# Altium PCB PCB_PCI_mez.PcbDoc
Units mm, origin at the board's own origin, x right, y up, seen from the top; angles counter-clockwise.
Board outline 106 x 57 mm, 2 copper layers (Top Layer, Bottom Layer); 6 components, 71 nets, 248 pads, 0 vias.
Unrouted connection lines stored in the file: 8.
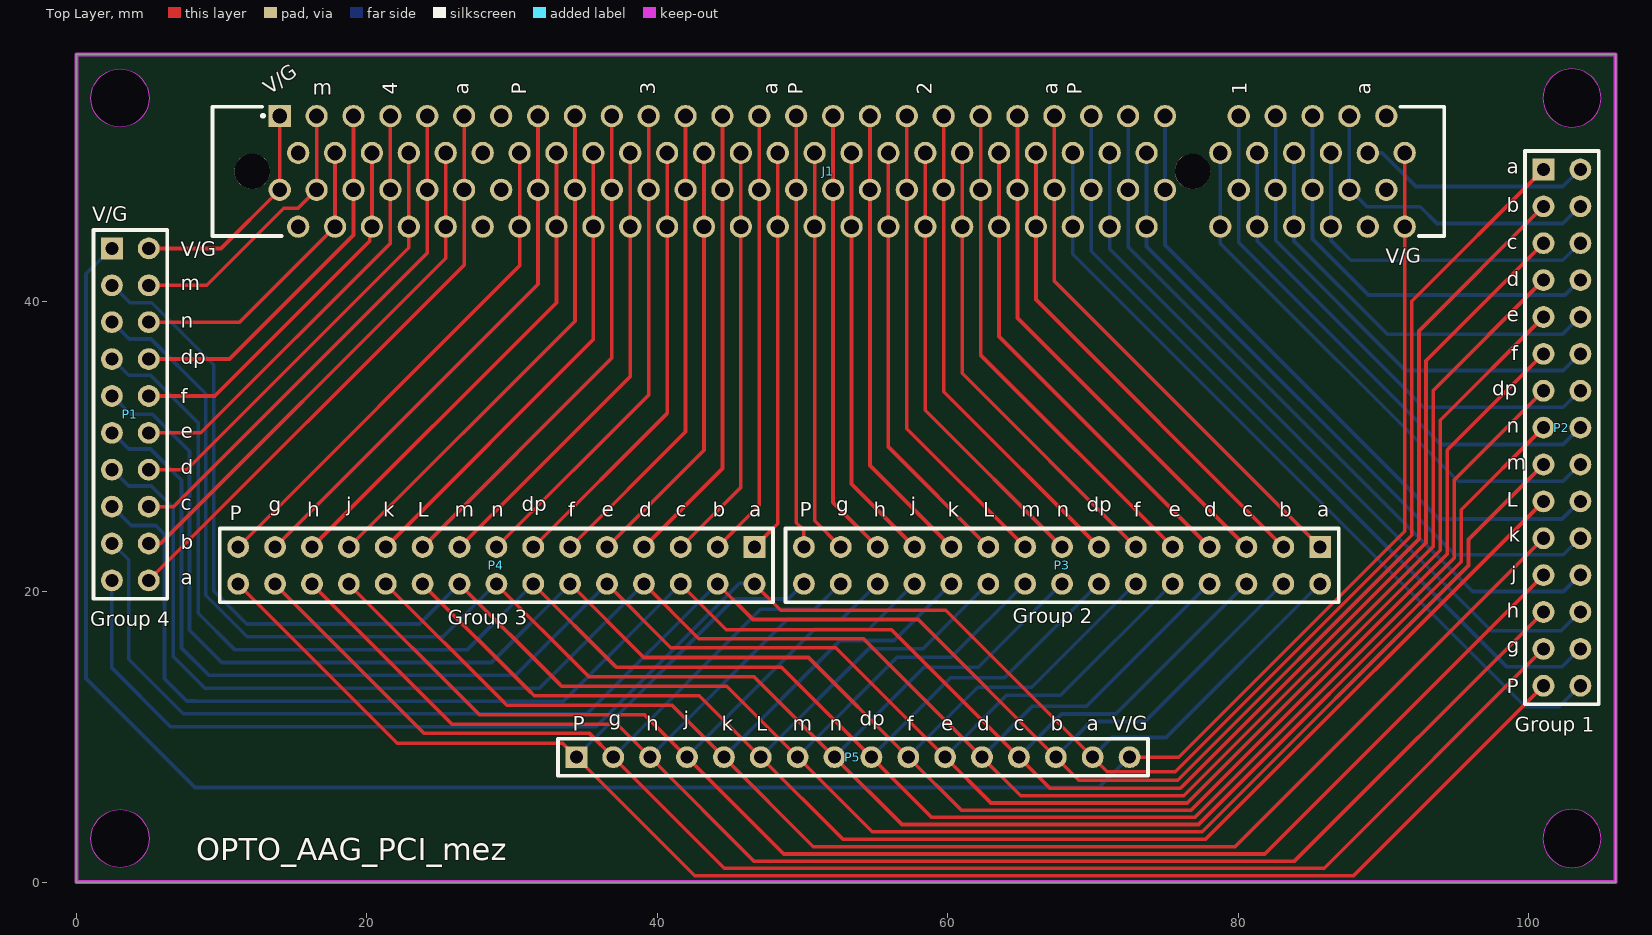
[diagram p0: Top Layer view]
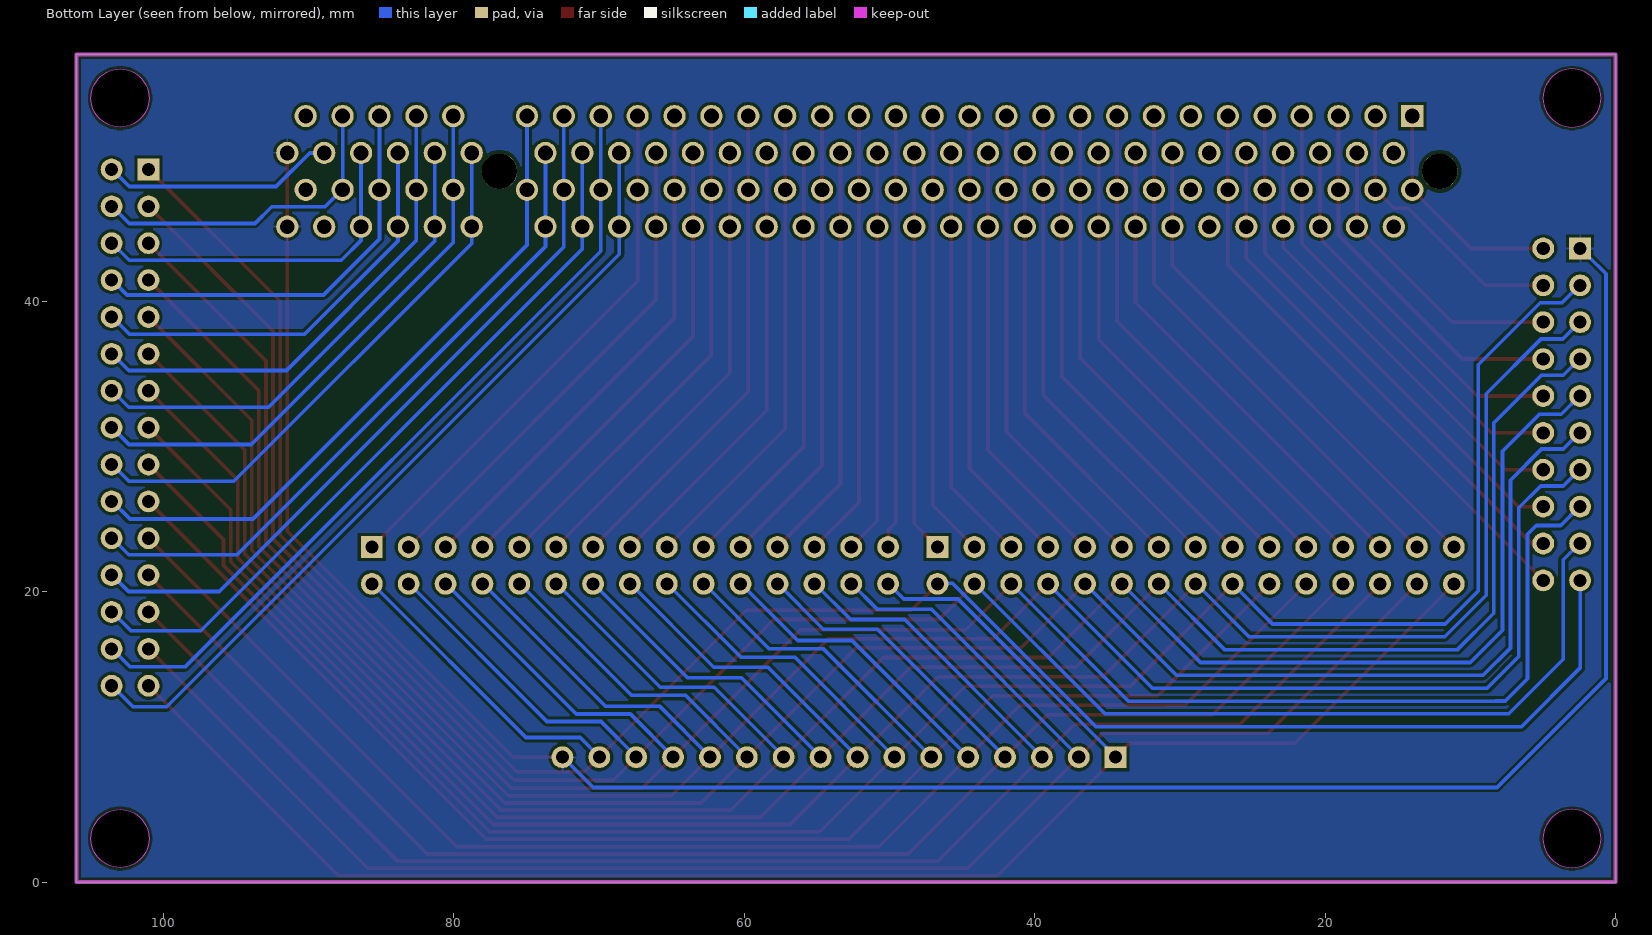
[diagram p1: Bottom Layer view, seen from below]

## Layer stack, top to bottom
Top Solder: solder mask 0.0102, Solder Resist, Dk 3.5
Top Layer: signal copper 0.0356
Dielectric 1: dielectric 0.32, FR-4, Dk 4.8
Bottom Layer: signal copper 0.0356
Bottom Solder: solder mask 0.0102, Solder Resist, Dk 3.5

## Board outline
0,0 0,57 106,57 106,0
cut-out: 101,3 ccw(c103,3) 103,1 ccw(c103,3) 105,3 ccw(c103,3) 103,5 ccw(c103,3)
cut-out: 101,54 ccw(c103,54) 103,52 ccw(c103,54) 105,54 ccw(c103,54) 103,56 ccw(c103,54)
cut-out: 3,52 cw(c3,54) 1,54 cw(c3,54) 3,56 cw(c3,54) 5,54 cw(c3,54)
cut-out: 3,1 cw(c3,3) 1,3 cw(c3,3) 3,5 cw(c3,3) 5,3 cw(c3,3)

## Design rules (kind name [scope] priority, off if disabled: settings)
BoardOutlineClearance [OnLayer('Multi-Layer')] p1: gap=0.254 ignorepadtopadclearanceinfootprint=FALSE except(0: Arc-SplitContinuation Track-SplitContinuation SMDPad-SplitContinuation THPad-SplitContinuation Via-SplitContinuation Fill-SplitContinuation Poly-SplitContinuation Region-SplitContinuation Text-SplitContinuation; 0.4: Arc-OutlineEdge Track-OutlineEdge SMDPad-OutlineEdge THPad-OutlineEdge Via-OutlineEdge Fill-OutlineEdge Poly-OutlineEdge Region-OutlineEdge Text-OutlineEdge)
Clearance [All] p1: gap=0.125 ignorepadtopadclearanceinfootprint=FALSE except(0.2: Arc-Fill Arc-Poly Track-Fill Track-Poly SMDPad-Fill SMDPad-Poly THPad-Fill THPad-Poly Via-Fill Via-Poly Fill-Fill Fill-Poly Poly-Poly Poly-Region Poly-Text; 0.25: Arc-Hole Track-Hole SMDPad-Hole THPad-Hole Via-Hole Fill-Hole Poly-Hole Region-Hole Text-Hole) // Standart
DiffPairsRouting [All] p1: maxlimit=0.254 minlimit=0.127 mostfreqgap=0.13 toplayer_minwidth=0.127 toplayer_maxwidth=0.381 toplayer_prefwidth=0.37 bottomlayer_minwidth=0.127 bottomlayer_maxwidth=0.381 bottomlayer_prefwidth=0.37 maxuncoupledlength=12.7
HoleSize [All] p1: absolutevalues=TRUE maxlimit=5 minlimit=0.3 maxpercent=80.000 minpercent=20.000
MinimumSolderMaskSliver [All] p1: minsoldermaskwidth=0.1
PlaneClearance "PlaneClearance-1 1/2 Oz" [All] p1: clearance=0.2 // Standart
PlaneConnect "TermalConnect-1 1/2 Oz" [All] p1: planeconnectstyle=Relief reliefexpansion=0.2 reliefentries=4 reliefconductorwidth=0.2 reliefairgap=0.2 // Standart
PolygonConnect "PolygonConnect-1 1/2 Oz" [All] p1: thpad.connectstyle=Relief thpad.reliefconductorwidth=0.15 thpad.reliefentries=4 thpad.polygonreliefangle="90 Angle" thpad.airgapwidth=0.2 smdpad.connectstyle=Relief smdpad.reliefconductorwidth=0.2 smdpad.reliefentries=4 smdpad.polygonreliefangle="90 Angle" smdpad.airgapwidth=0.2 via.connectstyle=Direct via.reliefconductorwidth=0.254 via.reliefentries=4 via.polygonreliefangle="90 Angle" via.airgapwidth=0.254 // Standart
RoutingVias [All] p1: holewidth=0.3 width=1.27 viastyle="Through Hole" minholewidth=0.3 minwidth=0.6 maxholewidth=0.711 maxwidth=1.27
SilkToSilkClearance [All] p1: silktosilkclearance=0
SilkToSolderMaskClearance [IsPad] p1: minsilkscreentomaskgap=0 clearancetoexposedcopper=TRUE
SolderMaskExpansion [All] p1: expansion=0.102 istentingtop=FALSE
SupplyNets [All] p1: voltage=0,000
UnRoutedNet [All] p1: checkbadconnections=TRUE
Width [All] p1: maxlimit=2.5 minlimit=0.125 preferedwidth=0.37
22 further rules are at their usual default settings.

## Classes and differential pairs
component class Sheet1_PCI_mez: J1 P2 P3 P4 P5

## Components (designator, comment, footprint, x,y, rotation, side; value= is the part's Value field where it differs from the comment)
J1 "5145154-4" TE_5145154-4 51.79,48.95 r180 top
P1 "Header 10X2" HDR2X10 2.44,43.64 r270 top
P2 "Header 15X2" HDR2X15 101.04,49.08 r270 top
P3 "Header 15X2" HDR2X15 85.66,23.08 r180 top
P4 "Header 15X2" HDR2X15 46.7,23.08 r180 top
P5 "Header 16" HDR1X16 34.43,8.6 r0 top

## Footprints (in the part's own frame and the unit in brackets; to place one, negate y for a bottom-side part, rotate by r counter-clockwise, add the part's x,y. Pads: shape width x height; smd on the part's side, far side on the other; paste and mask are expansions set on the pad)
HDR1X16 [mm] "Connector; Header; 16 Position"
  rect 1.5x1.5 hole 0.9: 1(0,0)
  round 1.5 hole 0.9: 2(2.54,0) 3(5.08,0) 4(7.62,0) 5(10.16,0) 6(12.7,0) 7(15.24,0) 8(17.78,0) 9(20.32,0) 10(22.86,0) 11(25.4,0) 12(27.94,0) 13(30.48,0) 14(33.02,0) 15(35.56,0) 16(38.1,0)
  silkscreen extent -1.27,-1.27 39.37,1.27
HDR2X10 [mm] "Connector; Header; 10x2 Position"
  rect 1.5x1.5 hole 0.9: 1(0,0)
  round 1.5 hole 0.9: 2(0,2.54) 3(2.54,0) 4(2.54,2.54) 5(5.08,0) 6(5.08,2.54) 7(7.62,0) 8(7.62,2.54) 9(10.16,0) 10(10.16,2.54) 11(12.7,0) 12(12.7,2.54) 13(15.24,0) 14(15.24,2.54) 15(17.78,0) 16(17.78,2.54) 17(20.32,0) 18(20.32,2.54) 19(22.86,0) 20(22.86,2.54)
  silkscreen extent -1.27,-1.27 24.13,3.81
HDR2X15 [mm] "Connector; Header; 15x2 Position"
  rect 1.5x1.5 hole 0.9: 1(0,0)
  round 1.5 hole 0.9: 2(0,2.54) 3(2.54,0) 4(2.54,2.54) 5(5.08,0) 6(5.08,2.54) 7(7.62,0) 8(7.62,2.54) 9(10.16,0) 10(10.16,2.54) 11(12.7,0) 12(12.7,2.54) 13(15.24,0) 14(15.24,2.54) 15(17.78,0) 16(17.78,2.54) 17(20.32,0) 18(20.32,2.54) 19(22.86,0) 20(22.86,2.54) 21(25.4,0) 22(25.4,2.54) 23(27.94,0) 24(27.94,2.54) 25(30.48,0) 26(30.48,2.54) 27(33.02,0) 28(33.02,2.54) 29(35.56,0) 30(35.56,2.54)
  silkscreen extent -1.27,-1.27 36.83,3.81
TE_5145154-4 [mm]
  rect 1.53x1.53 / inner round 1.53 / far side rect 1.53x1.53 hole 1.02: 1(37.79,-3.81)
  round 1.53 hole 1.02: 2(36.52,-1.27) 3(35.25,-3.81) 4(33.98,-1.27) 5(32.71,-3.81) 6(31.44,-1.27) 7(30.17,-3.81) 8(28.9,-1.27) 9(27.63,-3.81) 10(26.36,-1.27) 11(25.09,-3.81) 12(23.81,-1.27) 13(22.54,-3.81) 14(21.27,-1.27) 15(20,-3.81) 16(18.73,-1.27) 17(17.46,-3.81) 18(16.19,-1.27) 19(14.92,-3.81) 20(13.65,-1.27) 21(12.38,-3.81) 22(11.11,-1.27) 23(9.84,-3.81) 24(8.57,-1.27) 25(7.3,-3.81) 26(6.03,-1.27) 27(4.76,-3.81) 28(3.49,-1.27) 29(2.22,-3.81) 30(0.95,-1.27) 31(-0.32,-3.81) 32(-1.59,-1.27) 33(-2.86,-3.81) 34(-4.13,-1.27) 35(-5.4,-3.81) 36(-6.67,-1.27) 37(-7.94,-3.81) 38(-9.21,-1.27) 39(-10.48,-3.81) 40(-11.75,-1.27) 41(-13.02,-3.81) 42(-14.29,-1.27) 43(-15.56,-3.81) 44(-16.83,-1.27) 45(-18.1,-3.81) 46(-19.37,-1.27) 47(-20.64,-3.81) 48(-21.91,-1.27) 49(-23.18,-3.81) 50(-26.99,-1.27) 51(-28.26,-3.81) 52(-29.53,-1.27) 53(-30.8,-3.81) 54(-32.07,-1.27) 55(-33.34,-3.81) 56(-34.61,-1.27) 57(-35.88,-3.81) 58(-37.15,-1.27) 59(-38.42,-3.81) 60(-39.69,-1.27) 61(37.79,1.27) 62(36.52,3.81) 63(35.25,1.27) 64(33.98,3.81) 65(32.71,1.27) 66(31.44,3.81) 67(30.17,1.27) 68(28.9,3.81) 69(27.63,1.27) 70(26.36,3.81) 71(25.09,1.27) 72(23.81,3.81) 73(22.54,1.27) 74(21.27,3.81) 75(20,1.27) 76(18.73,3.81) 77(17.46,1.27) 78(16.19,3.81) 79(14.92,1.27) 80(13.65,3.81) 81(12.38,1.27) 82(11.11,3.81) 83(9.84,1.27) 84(8.57,3.81) 85(7.3,1.27) 86(6.03,3.81) 87(4.76,1.27) 88(3.49,3.81) 89(2.22,1.27) 90(0.95,3.81) 91(-0.32,1.27) 92(-1.59,3.81) 93(-2.86,1.27) 94(-4.13,3.81) 95(-5.4,1.27) 96(-6.67,3.81) 97(-7.94,1.27) 98(-9.21,3.81) 99(-10.48,1.27) 100(-11.75,3.81) 101(-13.02,1.27) 102(-14.29,3.81) 103(-15.56,1.27) 104(-16.83,3.81) 105(-18.1,1.27) 106(-19.37,3.81) 107(-20.64,1.27) 108(-21.91,3.81) 109(-23.18,1.27) 110(-26.99,3.81) 111(-28.26,1.27) 112(-29.53,3.81) 113(-30.8,1.27) 114(-32.07,3.81) 115(-33.34,1.27) 116(-34.61,3.81) 117(-35.88,1.27) 118(-37.15,3.81) 119(-38.42,1.27) 120(-39.69,3.81)
  round 2.44 hole 2.44 unplated: ""(-25.08,0) ""(39.69,0)
  silkscreen extent -42.42,-4.45 42.42,4.45, body extent -43.38,-4.45 41.45,4.45, height 17.53

## Part data
J1: "Conn, Card Edge, Thermoplastic, White, 60 Dual Pos., Gold Cont., PCI", Package=None, Centerline_Pitch="1.27 mm[.05 in]", Check_prices=https://www.snapeda.com/parts/5145154-4/TE+Connectivity+AMP+Connectors/view-part/?ref=eda, EU_RoHS_Compliance=Compliant, MF="TE Connectivity", MP=5145154-4, Number_of_Positions=120, Product_Type=Connector, SnapEDA_Link=https://www.snapeda.com/parts/5145154-4/TE+Connectivity+AMP+Connectors/view-part/?ref=snap
P1: "Header, 10-Pin, Dual row", LatestRevisionDate=17-Jul-2002, LatestRevisionNote="Re-released for DXP Platform.", Publisher="Altium Limited"
P2 P3 P4: "Header, 15-Pin, Dual row", LatestRevisionDate=17-Jul-2002, LatestRevisionNote="Re-released for DXP Platform.", Publisher="Altium Limited"
P5: "Header, 16-Pin", LatestRevisionDate=17-Jul-2002, LatestRevisionNote="Re-released for DXP Platform.", Publisher="Altium Limited"

## Nets (pads, with @x,y where several pads share a name; then routed paths per layer and width w, separated by ;. In a path a pad name is that pad's centre, name@x,y a point inside that pad or via, vN(x,y) a via of type N, cw(c..) or ccw(c..) an arc to the next point about the centre after c; other vN are vias at no path point)
a: P1.19 P2.1 P3.2 P4.2 P5.15 | length 163
  Top Layer w0.254: P4.2@46.7,20.52 48.5,18.72 59.87,18.72 P5.15 70.992,7.598 75.678,7.598 91.969,23.889 91.969,40.009 P2.1
  Bottom Layer w0.254: P1.19@2.44,20.82 P1.19 2.44,14.74 6.48,10.7 35.779,10.7 45.659,20.58 P4.2@46.7,20.58 ; P5.15@69.99,8.64 71.31,9.96 75.04,9.96 P3.2@85.66,20.58
a1: J1.58 P2.2 | length 16.1
  Bottom Layer w0.254: J1.58@88.963,50.22 88.965,50.218 89.937,50.218 92.256,47.9 102.36,47.9 P2.2@103.58,49.12
a2: J1.43 J1.103 P3.1 | length 37.3
  Top Layer w0.254: J1.43 J1.103 67.35,41.39 P3.1
a3: J1.28 J1.88 P4.1 | length 27.8
  Top Layer w0.254: P4.1 47.323,23.703 48.3,24.68 J1.88 J1.28
a4: J1.11 J1.71 P1.20 | length 41
  Top Layer w0.254: P1.20 26.7,42.5 J1.71 J1.11
b: P1.17 P2.3 P3.4 P4.4 P5.14 | length 162.2
  Top Layer w0.254: P4.4@44.16,20.52 46.6,18.08 57.97,18.08 P5.14 69.03,7.02 75.843,7.02 92.46,23.637 92.46,37.96 P2.3
  Bottom Layer w0.254: P1.17@2.44,23.36 3.599,22.201 3.599,15.346 7.36,11.585 35.165,11.585 P4.4@44.16,20.58 ; P5.14@67.45,8.64 69.87,11.06 73.6,11.06 P3.4@83.12,20.58
b1: J1.57 J1.117 P2.4 | length 22.5
  Bottom Layer w0.254: J1.57@87.67,52.8 87.67,47.72 88.881,46.509 92.551,46.509 93.7,45.36 102.36,45.36 P2.4@103.58,46.58
b2: J1.42 J1.102 P3.3 | length 34.2
  Top Layer w0.254: J1.42 J1.102 66.08,40.12 P3.3
b3: J1.27 J1.87 P4.3 | length 30.9
  Top Layer w0.254: P4.3 47.03,25.95 J1.87 J1.27
b4: J1.10 J1.70 P1.18 | length 35.8
  Top Layer w0.254: P1.18 5.78,23.32 25.43,42.97 J1.70 J1.10
c: P1.15 P2.5 P3.6 P4.6 P5.13 | length 162.7
  Top Layer w0.254: P4.6@41.62,20.52 44.759,17.381 56.129,17.381 P5.13 67.05,6.46 76.03,6.46 92.94,23.37 92.94,35.9 P2.5
  Bottom Layer w0.254: P1.15@2.44,25.9 3.78,24.56 5.46,24.56 6.063,23.957 6.063,13.997 7.59,12.47 8.24,12.47 30.96,12.46 33.54,12.46 P4.6 ; P4.6@41.6,20.56 P4.6@41.62,20.58 ; P5.13@64.91,8.64 67.85,11.58 71.58,11.58 P3.6@80.58,20.58
c1: J1.56 J1.116 P2.6 | length 24.3
  Bottom Layer w0.254: J1.56@86.4,50.26 J1.56 J1.116 86.4,44.18 87.76,42.82 102.36,42.82 P2.6@103.58,44.04
c2: J1.41 J1.101 P3.5 | length 36.2
  Top Layer w0.254: J1.41 J1.101 64.81,38.85 P3.5
c3: J1.26 J1.86 P4.5 | length 28.9
  Top Layer w0.254: P4.5@41.62,23.06 45.76,27.2 J1.86 J1.26
c4: J1.9 J1.69 P1.16 | length 35.9
  Top Layer w0.254: P1.16 6.7,25.86 24.16,43.32 J1.69 J1.9
d: P1.13 P2.7 P3.8 P4.8 P5.12 | length 161.5
  Top Layer w0.254: P4.8 42.86,16.76 54.21,16.76 P5.12 65.03,5.94 76.268,5.94 93.44,23.112 93.44,33.86 P2.7
  Bottom Layer w0.254: P1.13@2.44,28.44 3.599,27.281 5.159,27.281 6.66,25.78 6.66,15.54 8.845,13.355 31.895,13.355 P4.8 ; P5.12@62.37,8.64 65.85,12.12 69.58,12.12 P3.8@78.04,20.58
d1: J1.55 J1.115 P2.8 | length 29
  Bottom Layer w0.254: J1.55@85.13,52.8 J1.115 85.13,44.29 88.98,40.44 102.52,40.44 P2.8@103.58,41.5
d2: J1.40 J1.100 P3.7 | length 33.1
  Top Layer w0.254: J1.40 J1.100 63.54,37.58 P3.7
d3: J1.25 J1.85 P4.7 | length 31.9
  Top Layer w0.254: P4.7 44.49,28.49 J1.85 J1.25
d4: J1.8 J1.68 P1.14 | length 30.8
  Top Layer w0.254: P1.14 7.6,28.4 22.89,43.69 J1.68 J1.8
dp: P1.7 P2.13 P3.14 P4.14 P5.9 | length 159.1
  Top Layer w0.254: P4.14@31.46,20.52 37.055,14.925 37.186,14.794 48.556,14.794 P5.9 58.89,4.46 77.044,4.46 94.9,22.316 94.9,27.7 P2.13
  Bottom Layer w0.254: P1.7@2.44,36.06 3.599,34.901 5.098,34.901 8.38,31.619 8.38,18.51 10.88,16.01 26.93,16.01 P4.14 ; P4.14@31.44,20.56 P4.14@31.46,20.58 ; P5.9@54.75,8.64 60.19,14.08 63.92,14.08 P3.14@70.42,20.58
dp1: J1.52 J1.112 P2.14 | length 33.6
  Bottom Layer w0.254: J1.52@81.32,50.26 J1.52 J1.112 81.32,44.158 92.778,32.7 102.4,32.7 P2.14@103.58,33.88
dp2: J1.37 J1.97 P3.13 | length 34.1
  Top Layer w0.254: J1.37 J1.97 59.73,33.77 P3.13
dp3: J1.22 J1.82 P4.13 | length 31
  Top Layer w0.254: P4.13@31.46,23.06 40.68,32.28 J1.82 J1.22
dp4: J1.5 J1.65 P1.8 | length 25.8
  Top Layer w0.254: P1.8 10.54,36.02 19.08,44.56 J1.65 J1.5
e: P1.11 P2.9 P3.10 P4.10 P5.11 | length 160.9
  Top Layer w0.254: P4.10 40.937,16.143 52.287,16.143 P5.11 62.99,5.44 76.51,5.44 93.923,22.853 93.923,31.803 P2.9
  Bottom Layer w0.254: P1.11@2.44,30.98 3.599,29.821 5.098,29.821 7.24,27.679 7.24,16.12 9.12,14.24 30.24,14.24 P4.10 ; P4.10@36.52,20.56 P4.10@36.54,20.58 ; P5.11@59.83,8.64 64.05,12.86 67.78,12.86 P3.10@75.5,20.58
e1: J1.54 J1.114 P2.10 | length 29
  Bottom Layer w0.254: J1.54@83.86,50.26 J1.54 J1.114 83.86,44.153 90.273,37.74 102.36,37.74 P2.10@103.58,38.96
e2: J1.39 J1.99 P3.9 | length 35.2
  Top Layer w0.254: J1.39 J1.99 62.27,36.31 P3.9
e3: J1.24 J1.84 P4.9 | length 29.9
  Top Layer w0.254: P4.9@36.54,23.06 43.22,29.74 J1.84 J1.24
e4: J1.7 J1.67 P1.12 | length 30.8
  Top Layer w0.254: P1.12 8.56,30.94 21.62,44 J1.67 J1.7
f: P1.9 P2.11 P3.12 P4.12 P5.10 | length 160
  Top Layer w0.254: P4.12 39.071,15.469 50.421,15.469 P5.10 60.95,4.94 76.76,4.94 94.411,22.592 94.411,29.751 P2.11
  Bottom Layer w0.254: P1.9@2.44,33.52 3.74,32.22 5.239,32.22 7.78,29.679 7.78,17.345 10,15.125 28.585,15.125 P4.12 ; P4.12@33.98,20.56 P4.12@34,20.58 ; P5.10@57.29,8.64 62.07,13.42 65.8,13.42 P3.12@72.96,20.58
f1: J1.53 J1.113 P2.12 | length 33.8
  Bottom Layer w0.254: J1.113 82.59,44.19 91.54,35.24 102.4,35.24 P2.12@103.58,36.42 ; J1.113@82.59,47.72 J1.53@82.59,52.8
f2: J1.38 J1.98 P3.11 | length 32.1
  Top Layer w0.254: J1.38 J1.98 61,35.04 P3.11
f3: J1.23 J1.83 P4.11 | length 33
  Top Layer w0.254: P4.11@34,23.06 41.95,31.01 J1.83 J1.23
f4: J1.6 J1.66 P1.10 | length 25.8
  Top Layer w0.254: P1.10 9.52,33.48 20.209,44.169 20.209,44.999 J1.66 J1.6
g: P2.27 P3.28 P4.28 P5.2 | length 122.3
  Top Layer w0.254: P4.28@13.68,20.52 23.96,10.24 35.33,10.24 P5.2 44.61,0.96 85.94,0.96 ; 85.924,0.944 85.94,0.96 ; P2.27@101.024,16.044 85.94,0.96
  Bottom Layer w0.254: P5.2@36.97,8.64 47.13,18.8 50.86,18.8 P3.28@52.64,20.58
g1: J1.45 J1.105 P2.28 | length 55.4
  Bottom Layer w0.254: J1.45@69.89,52.8 J1.45 J1.105 69.89,43.454 98.524,14.82 102.3,14.82 P2.28@103.58,16.1
g2: J1.30 J1.90 P3.27 | length 27.9
  Top Layer w0.254: J1.30 50.84,24.88 P3.27
g3: J1.15 J1.75 P4.27 | length 37.2
  Top Layer w0.254: P4.27@13.69,23.07 31.79,41.17 J1.75 J1.15
h: P2.25 P3.26 P4.26 P5.3 | length 120.4
  Top Layer w0.254: P4.26@16.22,20.52 25.66,11.08 25.871,10.869 37.241,10.869 P5.3 46.67,1.44 83.88,1.44 ; 83.888,1.448 P2.25@101.048,18.608
  Bottom Layer w0.254: P5.3@39.51,8.64 48.95,18.08 52.68,18.08 P3.26@55.18,20.58
h1: J1.46 J1.106 P2.26 | length 50.5
  Bottom Layer w0.254: J1.46@71.16,50.26 J1.106 71.16,43.6 97.448,17.312 102.252,17.312 P2.26@103.58,18.64
h2: J1.31 J1.91 P3.25 | length 31
  Top Layer w0.254: J1.31 J1.91 52.11,26.15 P3.25
h3: J1.16 J1.76 P4.25 | length 34.1
  Top Layer w0.254: P4.25@16.23,23.07 33.06,39.9 J1.76 J1.16
j: P2.23 P3.24 P4.24 P5.4 | length 118.5
  Top Layer w0.254: P4.24@18.76,20.52 27.38,11.9 27.757,11.523 39.127,11.523 P5.4 48.71,1.94 81.84,1.94 ; 81.852,1.952 P2.23@101.052,21.152
  Bottom Layer w0.254: P5.4@42.05,8.64 50.83,17.42 54.56,17.42 P3.24@57.72,20.58
j1: J1.47 J1.107 P2.24 | length 50.5
  Bottom Layer w0.254: J1.107 72.43,43.75 96.172,20.008 102.408,20.008 P2.24@103.58,21.18 ; J1.107@72.43,47.72 J1.47@72.43,52.8
j2: J1.32 J1.92 P3.23 | length 28.9
  Top Layer w0.254: J1.32 J1.92 53.38,27.42 P3.23
j3: J1.17 J1.77 P4.23 | length 36.1
  Top Layer w0.254: P4.23@18.76,23.06 34.33,38.63 J1.77 J1.17
k: P2.21 P3.22 P4.22 P5.5 | length 116.6
  Top Layer w0.254: P4.22@21.3,20.52 29.265,12.555 29.643,12.177 41.013,12.177 P5.5 50.75,2.44 79.8,2.44 ; 79.816,2.456 P2.21@101.056,23.696
  Bottom Layer w0.254: P5.5@44.59,8.64 52.59,16.64 56.32,16.64 P3.22@60.26,20.58
k1: J1.48 J1.108 P2.22 | length 45.6
  Bottom Layer w0.254: J1.108 73.7,43.78 94.936,22.544 102.404,22.544 P2.22@103.58,23.72 ; J1.108@73.7,45.18 J1.48@73.7,50.26
k2: J1.33 J1.93 P3.21 | length 32
  Top Layer w0.254: J1.33 J1.93 54.65,28.69 P3.21
k3: J1.18 J1.78 P4.21 | length 33.1
  Top Layer w0.254: P4.21@21.31,23.07 35.6,37.36 J1.78 J1.18
L: P2.19 P3.20 P4.20 P5.6 | length 114.7
  Top Layer w0.254: P4.20@23.84,20.52 31.16,13.2 31.529,12.831 42.899,12.831 P5.6 52.77,2.96 77.78,2.96 P2.19
  Bottom Layer w0.254: P5.6@47.13,8.64 54.55,16.06 58.28,16.06 P3.20@62.8,20.58
L1: J1.49 J1.109 P2.20 | length 45.9
  Bottom Layer w0.254: J1.49@74.97,52.8 74.97,47.72 74.97,43.87 93.84,25 102.32,25 P2.20@103.58,26.26
L2: J1.34 J1.94 P3.19 | length 30
  Top Layer w0.254: J1.34 J1.94 55.92,29.96 P3.19
L3: J1.19 J1.79 P4.19 | length 35.1
  Top Layer w0.254: P4.19@23.859,23.079 36.87,36.09 J1.79 J1.19
m: P1.3 P2.17 P3.18 P4.18 P5.7 | length 157.8
  Top Layer w0.254: P4.18@26.38,20.52 33.16,13.74 33.414,13.486 44.784,13.486 P5.7 54.806,3.464 77.534,3.464 95.877,21.807 95.877,23.597 P2.17
  Bottom Layer w0.254: P1.3@2.44,41.14 3.68,39.9 5.179,39.9 9.449,35.63 9.449,20.051 11.72,17.78 23.62,17.78 P4.18 ; P4.18@26.36,20.56 P4.18@26.38,20.58 ; P5.7@49.67,8.64 56.51,15.48 60.24,15.48 P3.18@65.34,20.58
m1: J1.50 J1.110 P2.18 | length 38.3
  Bottom Layer w0.254: J1.110 78.78,43.98 95.16,27.6 102.38,27.6 P2.18@103.58,28.8 ; J1.110@78.78,45.18 J1.50@78.78,50.26
m2: J1.35 J1.95 P3.17 | length 33.1
  Top Layer w0.254: J1.35 J1.95 57.19,31.23 P3.17
m3: J1.20 J1.80 P4.17 | length 32
  Top Layer w0.254: P4.17@26.381,23.061 38.14,34.82 J1.80 J1.20
m4: J1.3 J1.63 P1.4 | length 19.4
  Top Layer w0.254: P1.4 8.98,41.1 14.28,46.4 15.26,46.4 J1.63 J1.3
n: P1.5 P2.15 P3.16 P4.16 P5.8 | length 158.1
  Top Layer w0.254: P4.16@28.92,20.52 35.01,14.43 35.3,14.14 46.67,14.14 P5.8 56.85,3.96 77.274,3.96 95.38,22.066 95.38,25.64 P2.15
  Bottom Layer w0.254: P1.5@2.44,38.6 3.64,37.4 5.139,37.4 8.9,33.639 8.9,19.76 11.76,16.9 11.76,16.895 25.24,16.895 ; 25.24,16.9 P4.16@28.92,20.58 ; P5.8@52.21,8.64 58.37,14.8 62.1,14.8 P3.16@67.88,20.58
n1: J1.51 J1.111 P2.16 | length 38.5
  Bottom Layer w0.254: J1.111 80.05,44.05 93.96,30.14 102.38,30.14 P2.16@103.58,31.34 ; J1.111@80.05,47.72 J1.51@80.05,52.8
n2: J1.36 J1.96 P3.15 | length 31
  Top Layer w0.254: J1.36 J1.96 58.46,32.5 P3.15
n3: J1.21 J1.81 P4.15 | length 34
  Top Layer w0.254: P4.15@28.92,23.06 39.41,33.55 J1.81 J1.21
n4: J1.4 J1.64 P1.6 | length 20.6
  Top Layer w0.254: P1.6 11.23,38.56 J1.64 J1.4
P: P2.29 P3.30 P4.30 P5.1 | length 124.3
  Top Layer w0.254: P4.30@11.14,20.52 22.1,9.56 33.47,9.56 P5.1 42.59,0.44 87.96,0.44 P2.29
  Bottom Layer w0.254: P5.1@34.43,8.64 45.29,19.5 49.02,19.5 P3.30@50.1,20.58
P1: J1.44 J1.104 P2.30 | length 55.5
  Bottom Layer w0.254: J1.44@68.62,50.26 68.62,45.18 68.62,43.24 99.78,12.08 102.1,12.08 P2.30@103.58,13.56
P2: J1.29 J1.89 P3.29 | length 29.9
  Top Layer w0.254: J1.29 J1.89 49.57,24.75 50.1,24.22 P3.29
P3: J1.14 J1.74 P4.29 | length 35.2
  Top Layer w0.254: P4.29@11.14,23.06 30.52,42.44 J1.74 J1.14
V/G: J1.60 J1.120 P1.1 P5.16 | length 157.7
  Top Layer w0.254: P5.16 75.92,8.6 91.48,24.16 J1.120 J1.60
  Bottom Layer w0.254: P1.1@2.44,43.68 1.875,43.115 1.875,43.11 0.66,41.895 0.66,14.02 8.16,6.52 70.41,6.52 P5.16@72.53,8.64
"V/G 2": J1.1 J1.61 P1.2 | length 15.8
  Top Layer w0.254: P1.2 9.96,43.64 J1.61 J1.1
pads on no net: J1. J1.2 J1.12 J1.13 J1.59 J1.62 J1.72 J1.73 J1.118 J1.119

## Polygon pours and split planes (outlines as drawn)
V/G on Bottom Layer "NONET_L-01_P-001" (solid, remove dead copper, pour order 0): -3.02,0 -3.02,57 112.98,57 112.98,0

## Keep-outs
Keep-Out Layer:
  the board outline again, w0.254

## Silkscreen, mask and mechanical layers (free items; w line width, h text height)
Top Overlay:
  text "m" at 16.274,54.214 h1
  text "4" at 22.086,54.214 h1 r90
  text "a" at 27.006,54.214 h1 r90
  text "P" at 30.986,54.214 h1 r90
  text "3" at 39.866,54.214 h1 r90
  text "a" at 48.306,54.214 h1 r90
  text "P" at 50.026,54.214 h1 r90
  text "2" at 58.906,54.214 h1 r90
  text "a" at 67.586,54.214 h1 r90
  text "P" at 69.246,54.214 h1 r90
  text "1" at 80.586,54.214 h1 r90
  text "a" at 89.126,54.214 h1 r90
  text "V/G" at 13.3,54.194 h1 r35.32
  text "a" at 98.494,48.774 h1
  text "b" at 98.494,46.134 h1
  text "V/G" at 1.074,45.514 h1
  text "c" at 98.494,43.574 h1
  text "V/G" at 7.174,43.114 h1
  text "V/G" at 90.171,42.617 h1 r0.58
  text "d" at 98.494,41.034 h1
  text "m" at 7.174,40.754 h1
  text "e" at 98.494,38.574 h1
  text "n" at 7.174,38.174 h1
  text "f" at 98.827,35.954 h1
  text "dp" at 7.174,35.667 h1
  text "dp" at 97.494,33.487 h1
  text "f" at 7.174,32.994 h1
  text "n" at 98.494,30.934 h1
  text "e" at 7.174,30.554 h1
  text "m" at 98.494,28.394 h1
  text "d" at 7.174,28.094 h1
  text "L" at 98.494,25.834 h1
  text "c" at 7.174,25.614 h1
  text "dp" at 30.674,25.527 h1
  text "g" at 13.234,25.507 h1
  text "j" at 18.594,25.507 h1
  text "g" at 52.314,25.507 h1
  text "j" at 57.454,25.507 h1
  text "dp" at 69.594,25.507 h1
  text "h" at 15.894,25.174 h1
  text "k" at 21.114,25.174 h1
  text "L" at 23.514,25.174 h1
  text "m" at 26.054,25.174 h1
  text "n" at 28.574,25.174 h1
  text "f" at 33.874,25.174 h1
  text "e" at 36.194,25.174 h1
  text "d" at 38.754,25.174 h1
  text "c" at 41.274,25.174 h1
  text "b" at 43.814,25.174 h1
  text "a" at 46.334,25.174 h1
  text "P" at 49.814,25.174 h1
  text "h" at 54.894,25.174 h1
  text "k" at 60.014,25.174 h1
  text "L" at 62.454,25.174 h1
  text "m" at 65.054,25.174 h1
  text "n" at 67.514,25.174 h1
  text "f" at 72.834,25.174 h1
  text "e" at 75.214,25.174 h1
  text "d" at 77.674,25.174 h1
  text "c" at 80.274,25.174 h1
  text "b" at 82.854,25.174 h1
  text "a" at 85.454,25.174 h1
  text "P" at 10.56,24.92 h1
  text "k" at 98.661,23.434 h1
  text "b" at 7.174,22.934 h1
  text "j" at 98.827,20.767 h1
  text "a" at 7.174,20.474 h1
  text "h" at 98.494,18.194 h1
  text "Group 2" at 64.494,17.827 h1
  text "Group 3" at 25.574,17.727 h1
  text "Group 4" at 0.954,17.607 h1
  text "g" at 98.494,15.807 h1
  text "P" at 98.494,13.014 h1
  text "g" at 36.674,10.767 h1
  text "j" at 41.814,10.767 h1
  text "dp" at 53.954,10.767 h1
  text "P" at 34.174,10.434 h1
  text "h" at 39.254,10.434 h1
  text "k" at 44.434,10.434 h1
  text "L" at 46.814,10.434 h1
  text "m" at 49.334,10.434 h1
  text "n" at 51.874,10.434 h1
  text "f" at 57.194,10.434 h1
  text "e" at 59.574,10.434 h1
  text "d" at 62.034,10.434 h1
  text "c" at 64.554,10.434 h1
  text "b" at 67.114,10.434 h1
  text "a" at 69.574,10.434 h1
  text "V/G" at 71.334,10.434 h1
  text "Group 1" at 99.074,10.367 h1
  text "OPTO_AAG_PCI_mez" at 8.254,1.508 h1.52
Mechanical 1:
  circle w0.254: c103,54 r2
  circle w0.254: c103,3 r2
  circle w0.254: c3,3 r2
  circle w0.254: c3,54 r2
  pour cut-out: 3,52 cw(c3,54) 1,54 cw(c3,54) 3,56 cw(c3,54) 5,54 cw(c3,54)
  lines w0.254: 0,0 106,0 106,57 0,57 0,0